# Altium PCB PCB3.PcbDoc
Units mil, origin at the board's own origin, x right, y up, seen from the top; angles counter-clockwise.
Board outline 1159.63 x 933.06 mil, 4 copper layers (Component Side, Ground Plane, Power Plane, Solder Side), stack 33.234 mil thick; 34 components, 28 nets, 138 pads, 126 vias.
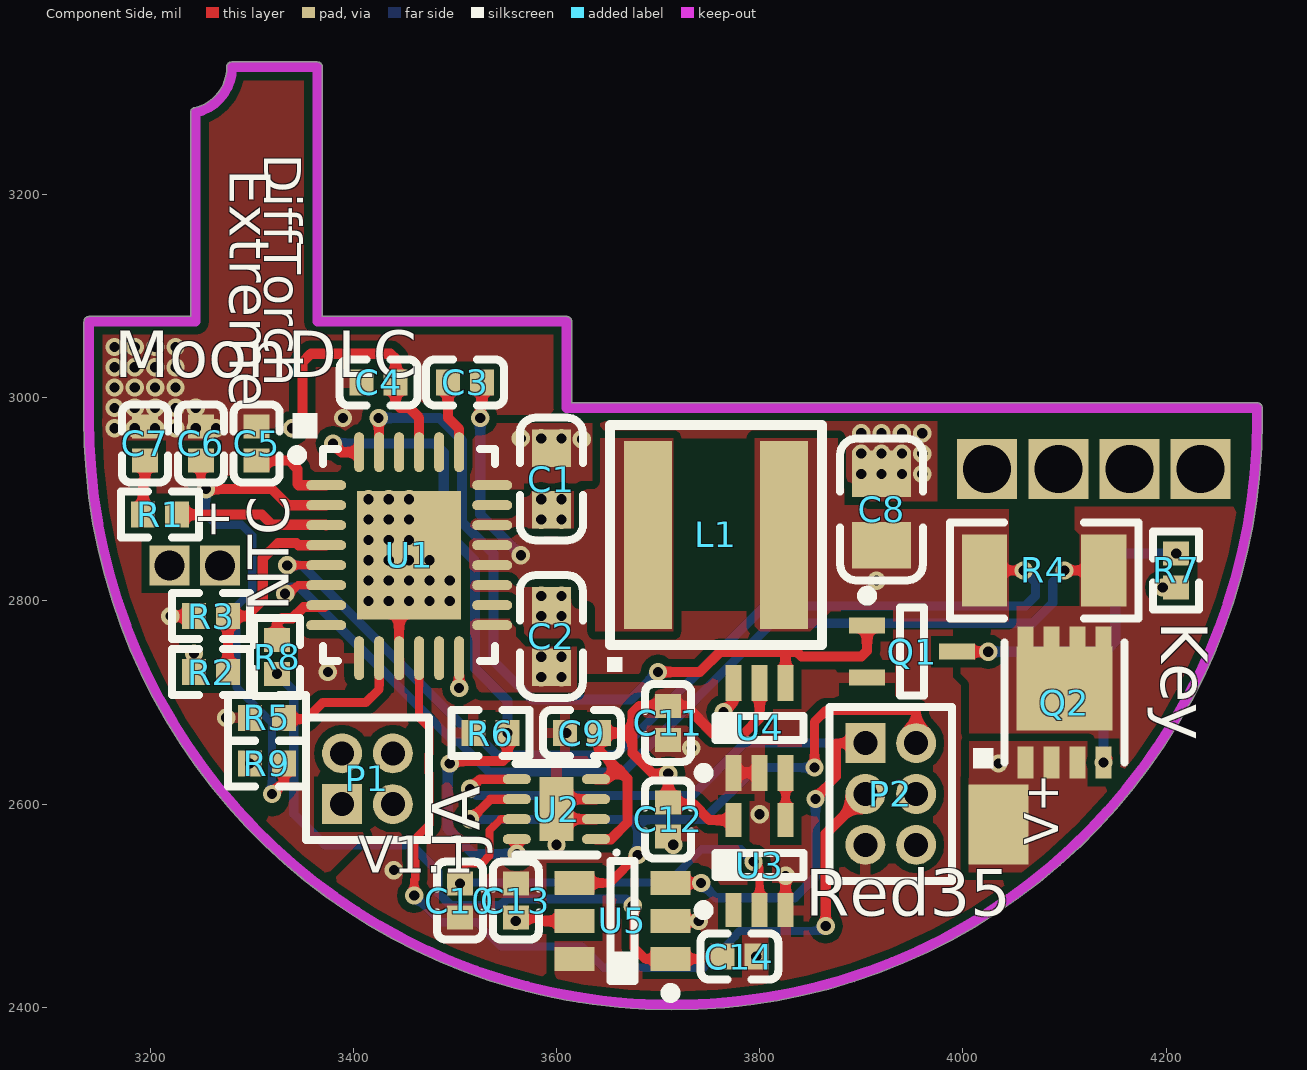
[diagram p0: Component Side view]
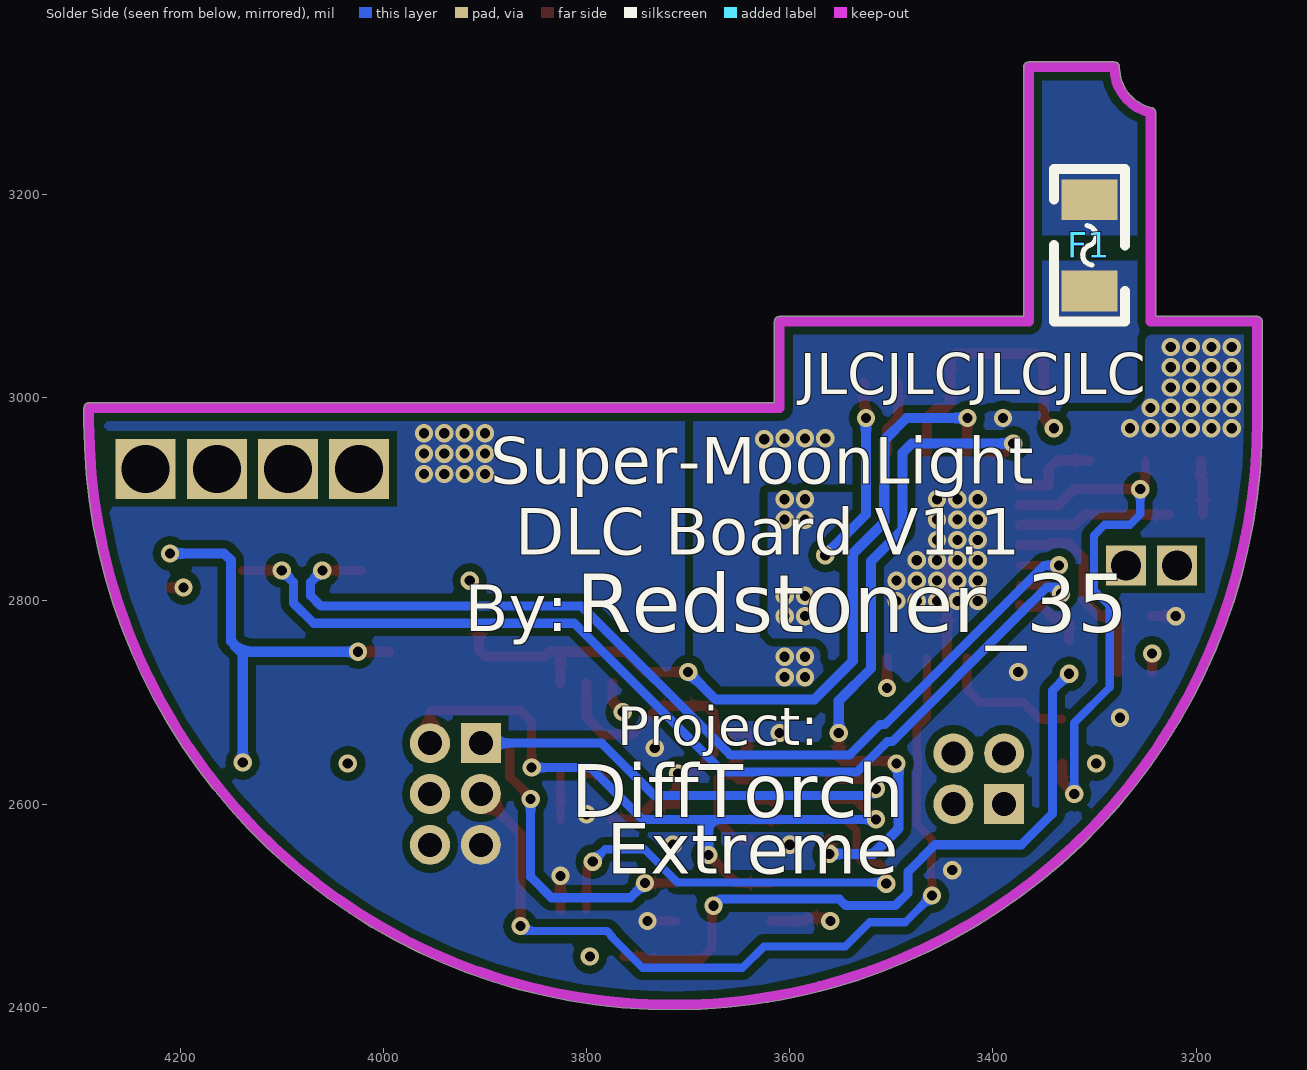
[diagram p1: Solder Side view, seen from below]
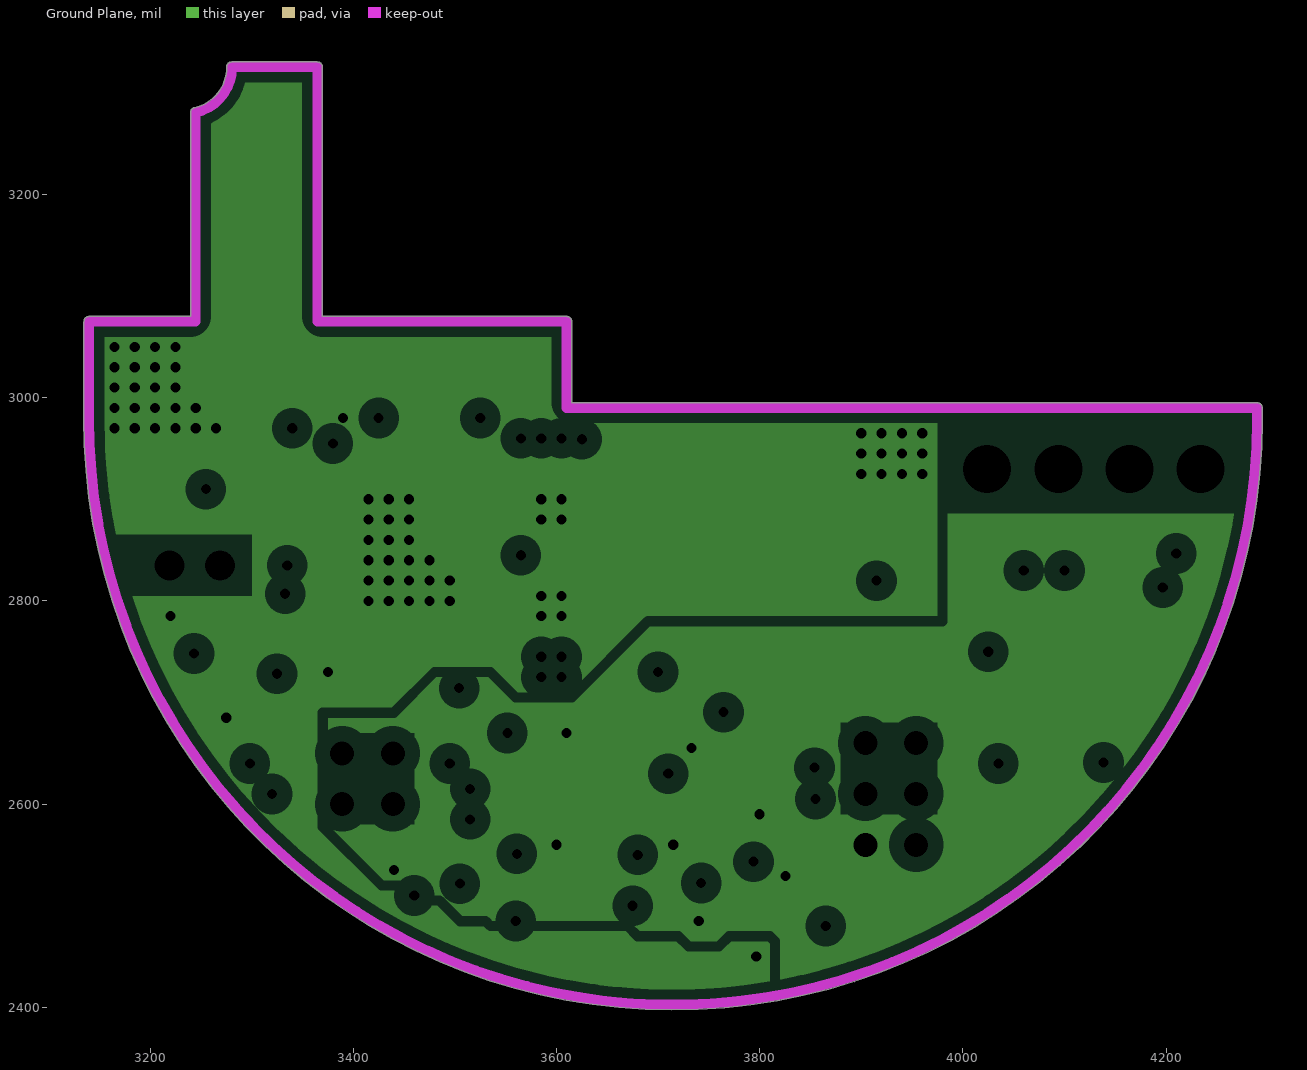
[diagram p2: Ground Plane, clearances drawn from the general rule]
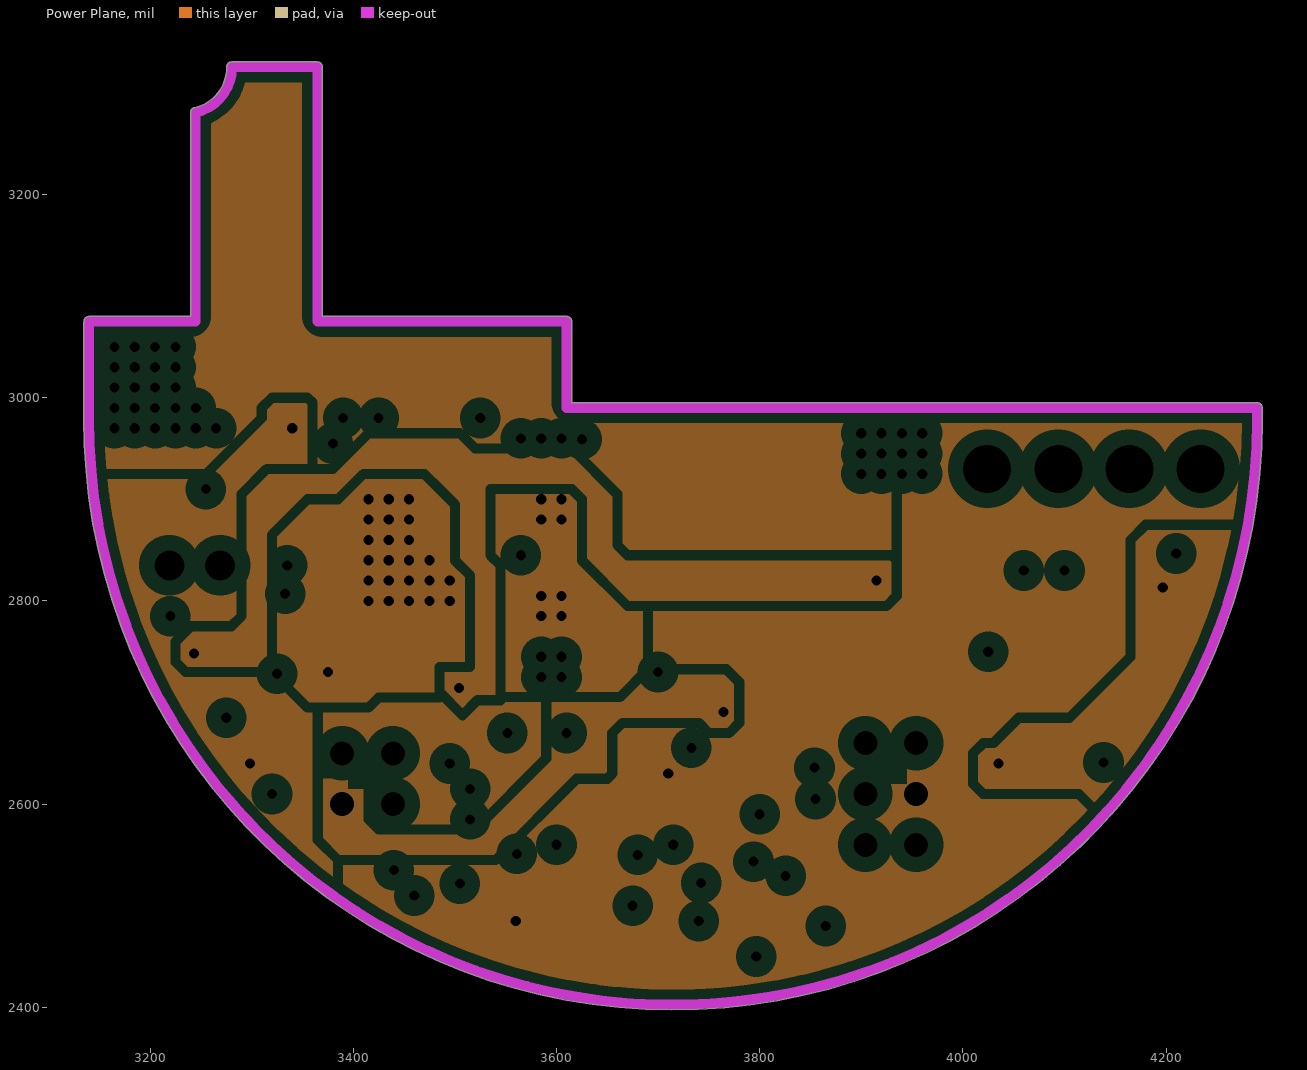
[diagram p3: Power Plane, clearances drawn from the general rule]
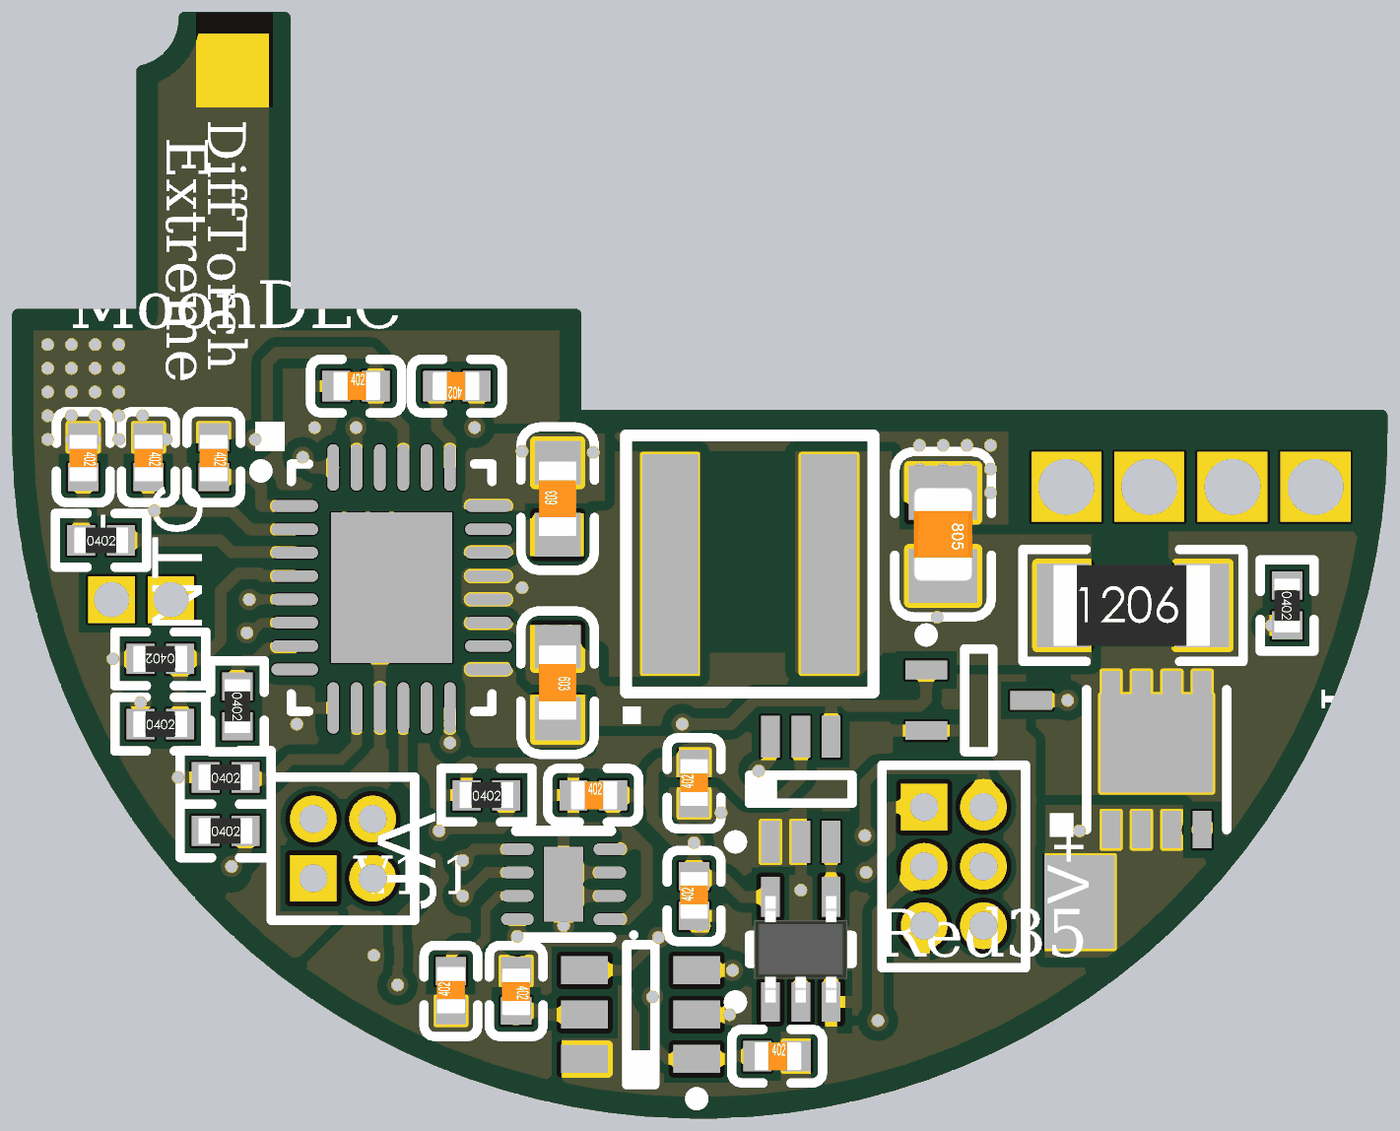
[diagram p4: 3D render of the assembled board from above, using the file's embedded part models]

## Layer stack, top to bottom
Top Solder: solder mask 0.4, Solder Resist, Dk 3.5
Component Side: signal copper 1.4
Dielectric 1: core 12.6, FR-4, Dk 4.8
Ground Plane: plane copper 1.417
Dielectric 3: prepreg 5, Dk 4.2
Power Plane: plane copper 1.417
Dielectric 4: core 10, Dk 4.2
Solder Side: signal copper 1.4
Bottom Solder: solder mask 0.4, Solder Resist, Dk 3.5

## Board outline
3134.99,2979.99 3134.99,3075 cw(c3140,3075) 3140,3080.01 3239.84,3080.01 3239.84,3280.65 cw(c3244.86,3280.65) 3243.77,3285.54 ccw(c3235,3325) 3275.42,3325 ccw(c3235,3325) 3275.42,3325.36 ccw(c3235,3325) 3275.42,3325.39 3275.42,3325.36 cw(c3280.43,3325.43) 3280.43,3330.45 3364.68,3330.45 cw(c3364.68,3325.43) 3369.7,3325.43 3369.7,3080.01 3610,3080.01 cw(c3610,3075) 3615.01,3075 3615.01,2995.01 4289.6,2995.01 cw(c4289.6,2990) 4294.61,2990 4294.61,2977.2 cw(c3714.8,2977.2)

## Design rules (kind name [scope] priority, off if disabled: settings)
Clearance [All] p1: gap=8
DiffPairsRouting [All] p1: maxlimit=9 minlimit=8 mostfreqgap=8 toplayer_minwidth=8 toplayer_maxwidth=9 toplayer_prefwidth=8 bottomlayer_minwidth=8 bottomlayer_maxwidth=9 bottomlayer_prefwidth=8 maxuncoupledlength=500
PlaneClearance [All] p1: clearance=15
PlaneConnect [All] p1: planeconnectstyle=Direct reliefexpansion=20 reliefentries=4 reliefconductorwidth=10 reliefairgap=10
PolygonConnect PolygonConnect_1 [IsVia] p1: connectstyle=Direct reliefconductorwidth=10 reliefentries=4 polygonreliefangle="90 Angle" airgapwidth=10
PolygonConnect [All] p2: connectstyle=Direct reliefconductorwidth=10 reliefentries=4 polygonreliefangle="90 Angle" airgapwidth=10
RoomDefinition main [InComponentClass('main')] p1: confinementstyle=ConfineIn formatcopy=TRUE lockcomponents=FALSE outline 7045,1060 7305,1060 7305,1460 7045,1460
RoutingVias [All] p1: holewidth=28 width=50 viastyle="Through Hole" minholewidth=28 minwidth=50 maxholewidth=28 maxwidth=50
SolderMaskExpansion [All] p1: expansion=4
Width [All] p1: maxlimit=200 minlimit=8 preferedwidth=10
27 further rules are at their usual default settings.

## Components (designator, comment, footprint, x,y, rotation, side; value= is the part's Value field where it differs from the comment)
C1 "100nF (104) 10% 50V" 0603_C 3595,2920 r90 top
C2 "100nF (104) 10% 50V" 0603_C 3595,2765 r270 top
C3 "100nF (104) 10% 16V" 0402_C 3510,3015 r180 top
C4 "10uF (106) 20% 6.3V" 0402_C 3425,3015 r0 top
C5 "1.0uF (105) 10% 25V" 0402_C 3305,2955 r270 top
C6 "1nF (102) 10% 50V" 0402_C 3250,2955 r270 top
C7 "8.2nF (822) 10% 50V" 0402_C 3195,2955 r270 top
C8 "22uF (226) 20% 25V" 0805_C 3920,2890 r270 top
C9 "100nF (104) 10% 16V" 0402_C 3625,2670 r0 top
C10 "10nF (103) 10% 50V" 0402_C 3505,2505 r90 top
C11 "100nF (104) 10% 16V" 0402_C 3710,2680 r90 top
C12 "100nF (104) 10% 16V" 0402_C 3710,2585 r90 top
C13 "100nF (104) 10% 16V" 0402_C 3560,2505 r270 top
C14 "4.7uF (475) 20% 10V" 0402_C 3780,2450 r0 top
F1 "0805 5A KOA一次性熔断" "FU 0805" 3305,3150 r270 bottom
L1 "XAL5030-222ME" FEXL0520A-***M 3690,2865 r0 top
P1 "1.27mm 2P双排针" MHDR2X2 3389.01,2600 r0 top locked
P2 "1.27mm 3P双排针" MHDR2X3 3904.01,2660 r270 top locked
Q1 "2N7002KW" SC70-3 3950,2750 r0 top
Q2 "AON7421" DFN-8_L3.0-W3.0-P0.65-BL 4100,2700 r0 top locked
R1 "200Ω (2000) ±1%" 0402_R 3210,2885 r0 top
R2 "18KΩ (1802) ±1%" 0402_R 3260,2730 r0 top
R3 "2.7KΩ (2701) ±1%" 0402_R 3260,2785 r180 top
R4 "RLM12FTCMR015" 1206_R 4080,2830 r0 top
R5 "82.5KΩ (8253) ±1%" 0402_R 3315,2685 r0 top
R6 "3.3KΩ (3301) ±1%" 0402_R 3535,2670 r0 top
R7 "4.7KΩ (4701) ±1%" 0402_R 4210,2830 r270 top
R8 "3.3KΩ (3301) ±1%" 0402_R 3325,2745 r270 top
R9 "470KΩ (4703) ±1%" 0402_R 3315,2640 r0 top
U1 "LT3935RV" LQFN-28 3455,2845 r0 top locked
U2 "AD5693RACPZ-RL7" LFCSP-8-10 3600,2595 r180 top
U3 "SN74LVC1G17DCKR" DCK0005A_N 3800,2540 r90 top
U4 "NC7SB3157P6X" SC70-6 3800,2675 r90 top
U5 "MCP3421A0T" SOT95P245X110-6N 3665,2485 r180 top

## Footprints (in the part's own frame and the unit in brackets; to place one, negate y for a bottom-side part, rotate by r counter-clockwise, add the part's x,y. Pads: shape width x height; smd on the part's side, far side on the other; paste and mask are expansions set on the pad)
0402_C [mm]
  rect 0.6x0.65 smd mask+0.051: 1(-0.425,0) 2(0.425,0)
  silkscreen extent -0.97,-0.58 0.97,0.58, body extent -0.48,-0.3 0.52,0.3, height 0.2
0402_R [mm]
  rect 0.6x0.65 smd mask+0.051: 1(-0.425,0) 2(0.425,0)
  silkscreen extent -0.97,-0.58 0.97,0.58, body extent -0.57,-0.27 0.58,0.28, height 0.41
0603_C [mm]
  rect 0.93x0.98 smd: 1(-0.77,0) 2(0.77,0)
  silkscreen extent -1.53,-0.79 1.54,0.79, body extent -0.8,-0.4 0.8,0.4, height 0.3
0805_C [mm]
  rect 1.16x1.47 smd: 1(-0.89,0) 2(0.89,0)
  silkscreen extent -1.77,-1.04 1.77,1.04, body extent -1,-0.62 1,0.63, height 0.77
1206_R [mm]
  rect 1.13x1.8 smd: 1(-1.49,0) 2(1.49,0)
  silkscreen extent -2.36,-1.2 2.35,1.2, body extent -1.7,-0.86 1.65,0.87, height 0.85
DCK0005A_N [mm] "SOT23, 5-Leads, Body 2.15x1.4mm, Pitch 0.65mm, IPC Medium Density"
  rect 0.85x0.4 smd: 1(-1.125,0.65) 2(-1.125,0) 3(-1.125,-0.65) 4(1.125,-0.65) 5(1.125,0.65)
  silkscreen extent -1.25,-1.1 0.3,1.52, body extent -1.14,-1 1.14,1, height 1.1
DFN-8_L3.0-W3.0-P0.65-BL [mm]
  rect 0.4x0.8 smd paste-100 mask+0.051: 1(-0.975,-1.5) 2(-0.325,-1.5) 3(0.325,-1.5) 4(0.975,-1.5) 5(0.975,1.5) 6(0.325,1.5) 7(-0.325,1.5) 8(-0.975,1.5)
  rect 2.4x2.1 smd paste-100 mask+0.051: 8(0,0.35)
  silkscreen extent -1.5,-1.5 1.5,1.5
FEXL0520A-***M [mm] "SZ CJIANG Automotive grade Inductor"
  rect 1.2x4.7 smd mask+0.05: 1(0,0) 2(3.4,0)
  silkscreen extent -0.95,-2.75 4.35,2.75, body extent -1.02,-2.79 4.44,2.79, height 2
"FU 0805" [mil] "贴片保险丝"
  rect 40x55 smd: 1(-45,0) 2(45,0)
  silkscreen extent -75,-35 75,35, body extent -39,-24 39,24, height 20
LFCSP-8-10 [mm] "SON, 8-Leads, Body 1.95x1.95mm, Pitch 0.50mm, Thermal Pad 1.60x0.78mm, IPC Medium Density"
  oval 0.7x0.25 smd mask+0.02: 1(-0.99,0.75) 2(-0.99,0.25) 3(-0.99,-0.25) 4(-0.99,-0.75) 5(0.99,-0.75) 6(0.99,-0.25) 7(0.99,0.25) 8(0.99,0.75)
  rect 0.85x1.6 smd mask+0.02: 9(0,0)
  silkscreen extent -1.55,-1.14 1.02,1.14, body extent -1,-1 1,1, height 0.6
LQFN-28 [mm] "QFN, 28-Leads, Body 4.00x5.00mm, Pitch 0.50mm, Thermal Pad 2.60x3.22mm, IPC Low Density"
  oval 1x0.25 smd mask+0.03: 1(-2.075,1.75) 2(-2.075,1.25) 3(-2.075,0.75) 4(-2.075,0.25) 5(-2.075,-0.25) 6(-2.075,-0.75) 7(-2.075,-1.25) 8(-2.075,-1.75) 15(2.075,-1.75) 16(2.075,-1.25) 17(2.075,-0.75) 18(2.075,-0.25) 19(2.075,0.25) 20(2.075,0.75) 21(2.075,1.25) 22(2.075,1.75)
  oval 0.25x1.1 smd mask+0.03: 9(-1.25,-2.575) 10(-0.75,-2.575) 11(-0.25,-2.575) 12(0.25,-2.575) 13(0.75,-2.575) 14(1.25,-2.575)
  oval 0.25x1 smd mask+0.03: 23(1.25,2.575) 24(0.75,2.575) 25(0.25,2.575) 26(-0.25,2.575) 27(-0.75,2.575) 28(-1.25,2.575)
  rect 2.6x3.22 smd mask+0.03: 29(0,0)
  silkscreen extent -2.92,-2.65 2.15,2.65, body extent -2,-2.5 2,2.5, height 1.05
MHDR2X2 [mm] "Connector; Header; 2x2 Position"
  rect 1x1 hole 0.6: 1(0,0)
  round 1 hole 0.6: 2(0,1.27) 3(1.27,0) 4(1.27,1.27)
  silkscreen extent -0.9,-0.9 2.17,2.17
MHDR2X3 [mm] "Connector; Header; 3x2 Position"
  rect 1x1 hole 0.6: 1(0,0)
  round 1 hole 0.6: 2(0,1.27) 3(1.27,0) 4(1.27,1.27) 5(2.54,0) 6(2.54,1.27)
  silkscreen extent -0.9,-0.9 3.44,2.17
SC70-3 [mm] "3 Lead SC70(SOT-323) package for small Transistor"
  rect 0.9x0.4 smd mask+0.05: 1(-1.125,0.65) 2(-1.125,-0.65) 3(1.125,0)
  silkscreen extent -1.25,-1.1 0.3,1.52, body extent -0.67,-1.1 0.67,1.1, height 1.1
SC70-6 [mm] "SOT23, 6-Leads, Body 2.00x2.10mm, Pitch 0.65mm, IPC Medium Density"
  rect 0.9x0.4 smd mask+0.05: 1(-1.125,0.65) 2(-1.125,0) 3(-1.125,-0.65) 4(1.125,-0.65) 5(1.125,0) 6(1.125,0.65)
  silkscreen extent -1.25,-1.1 0.3,1.52, body extent -0.67,-1.1 0.67,1.1, height 1.1
SOT95P245X110-6N [mm] "SOT23, 6-Leads, Body 2.90x2.45mm, Pitch 0.95mm, IPC Medium Density"
  rect 1x0.6 smd: 1(-1.2,0.95) 2(-1.2,0) 3(-1.2,-0.95) 4(1.2,-0.95) 5(1.2,0) 6(1.2,0.95)
  silkscreen extent -1.33,-1.5 0.3,1.92, body extent -0.7,-1.5 0.7,1.5, height 1.1

## Part data
C1 C2: library part "0603 100nF (104) 10% 50V", "贴片电容"
C3 C9 C11 C12 C13: library part "0402 100nF (104) 10% 16V", "贴片电容"
C4: library part "0402 10uF (106) 20% 6.3V", "贴片电容"
C5: library part "0402 1.0uF (105) 10% 25V", "贴片电容"
C6: library part "0402 1nF (102) 10% 50V", "贴片电容"
C7: library part "0402 2.2nF (222) 10% 50V", "贴片电容"
C8: library part "0805 22uF (226) 20% 25V", "贴片电容"
C10: library part "0402 10nF (103) 10% 50V", "贴片电容"
C14: library part "0402 4.7uF (475) 20% 10V", "贴片电容"
F1: library part "Fuse 1", "Fuse"
L1: library part "Inductor Iron", "Magnetic-Core Inductor"
P1: library part MHDR2X2, "Header, 2-Pin, Dual row"
P2: library part MHDR2X3, "Header, 3-Pin, Dual row"
Q1: library part "2N7002 7002", "MOS(场效应管)"
Q2: library part "SON/DFN5x6 MOS", "PDFN3x3 -20V -50A 5.8mΩ P-Ch MOSFET"
R1 R2 R3: library part "0402 10KΩ (1002) 1%", "贴片电阻"
R4: library part "1206 0Ω (0R0) 1%", "贴片合金检流电阻 15mΩ (R015) ±1% 1206 1W"
R5: library part "0402 1KΩ (1001) 1%", "贴片电阻"
R6 R8: library part "0402 3.3KΩ (3301) 1%", "贴片电阻"
R7: library part "0402 4.7KΩ (4701) 1%", "贴片电阻"
R9: library part "0402 470KΩ (4703) 1%", "贴片电阻"
U1: "36V 4A Synchronous Buck LED Driver"
U2: "16bit I2C Nano DAC with 2.5V internal Ref in 2x2mm SON"
U3: "Single Schmitt-Trigger Buffer, DCK0005A, LARGE T&R"
U4: "Low-Voltage Analog Switch SPDT,1.8-5V Power"
U5: library part MCP3421, "I2C差分输入ADC，18位 240SPS"

## Free pads (board coordinates)
  rect 39.37x39.37 hole 29.53 mask+1.97: 0(3268.94,2835) 1(3218.94,2835)
  rect 59.06x78.74 smd mask+1.97: 0(4035,2580)
  round 0 all layers, no hole paste+0 mask+0: 1(3373.31,2815.47) 1(3373.31,2835.16) 1(4021.34,2830) 1(4138.66,2830)
  rect 59.06x59.06 hole 47.24 mask+1.97: 2(4023.94,2930) 4(4093.94,2930) 5(4233.94,2930) 6(4163.94,2930)

## Via types
v1: diameter 18, hole 10, Component Side to Solder Side, tented both sides, 126 vias

## Nets (pads, with @x,y where several pads share a name; then routed paths per layer and width w, separated by ;. In a path a pad name is that pad's centre, name@x,y a point inside that pad or via, vN(x,y) a via of type N, cw(c..) or ccw(c..) an arc to the next point about the centre after c; other vN are vias at no path point)
3V3: C9.2 C11.2 C12.2 C13.2 P2.4 U2.1 U2.4 U3.5 U4.5 U5.5 | length 623.3
  Component Side w10: v1(3560,2485) C13.2 3581.73,2488.27 3585,2485 U5.5 ; U2.1 3653.49,2565.47 3670,2581.98 3670,2625 3660,2635 ; U2.4 3649.53,2624.53 3660,2635 ; U3.5 3750.71,2584.29 3735.01,2599.99 3710,2599.99 C12.2 v1(3710,2630) 3695,2630 3675,2650 3675,2670 ; U4.5 3800,2685 3783.59,2668.59 3755.3,2668.59 3727.16,2696.73 C11.2 3681.73,2696.73 3675,2690 3675,2670 ; 3660,2635 3641.73,2653.27 C9.2 3675,2670
12V: C1.2 C2.2 F1.2 U1.15 U1.22
  other v1: 3585,2725 3605,2725 3585,2745 3605,2745 3625,2959.09 3565,2960 3585,2960 3605,2960
BST: C3.2 U1.23 | length 73.2
  Component Side w10: C3.2 3493.27,2980.16 3504.21,2969.21 U1.23
BUCKEN: U3.4 U4.3 | length 46.4
  Component Side w8: U3.4 U4.3
DACREF: C10.2 U2.7 U3.2 | length 462.9
  Component Side w8: v1(3505,2521.73) 3505,2535 3511.73,2541.73 3526.73,2541.73 3534.24,2549.24 3534.24,2574.24 3545.16,2585.16 U2.7 ; v1(3793.9,2543.4) 3800,2537.3 U3.2
  Solder Side w8: v1(3505,2521.73) 3506.27,2523 3710.3,2523 3742.94,2555.64 3781.67,2555.64 v1(3793.9,2543.4)
DIM: R6.2 U1.28 U2.8 | length 684.6
  Component Side w10: v1(3380,2955) 3388.62,2946.38 U1.28 ; v1(3495,2640) 3497.45,2642.45 3547.45,2642.45 3551.73,2646.73 v1(3551.73,2670) ; v1(3561.02,2551.02) U2.8
  Solder Side w10: v1(3380,2955) 3480,2955 3489,2946 3489,2870.09 3520,2839.09 3520,2733.43 3551.73,2701.7 v1(3551.73,2670) ; v1(3495,2640) 3493,2638 3493,2575.89 3517.86,2551.02 v1(3561.02,2551.02)
EN: Q1.1 U1.27 U4.4 | length 817.6
  Component Side w10: v1(3425,2980) 3425,2970 3425.47,2969.53 U1.27 ; v1(3700,2730) 3741.14,2730 3761.15,2750.01 3825,2750.01 ; U4.4 3825.59,2749.42 3825,2750.01 ; Q1.1 3905.71,2750.99 3900,2745.28 3841.19,2745.28 3836.46,2750.01 3825,2750.01
  Solder Side w10: v1(3425,2980) 3485,2980 3507,2958 3507,2877.54 3538,2846.54 3538,2740.89 3575.89,2703 3673,2703 v1(3700,2730)
GND: C1.1 C2.1 C4.1 C5.1 C6.1 C7.1 C8.1 C14.2 R3.2 R5.1 U1.9 U1.11 U1.17 U1.20 U1.29 U5.6 | length 119.8
  Component Side w9: v1(3375,2730) v1@3380,2730
  Component Side w10: v1(3220,2785) R3.2 ; U1.11 U1.29@3445.16,2835.16
  other v1: 3796.73,2450 3275,2685 3585,2785 3605,2785 3415,2800 3435,2800 3455,2800 3475,2800 3495,2800 3585,2805 3605,2805 3415,2820 3435,2820 3455,2820 3475,2820 3495,2820 3415,2840 3435,2840 3455,2840 3475,2840 3415,2860 3435,2860 3455,2860 3415,2880 3435,2880 3455,2880 3585,2880 3605,2880 3415,2900 3435,2900 3455,2900 3585,2900 3605,2900 3900,2925 3920,2925 3940,2925 3960,2925 3900,2945 3920,2945 3940,2945 3960,2945 3900,2965 3920,2965 3940,2965 3960,2965 3165,2970 3185,2970 3205,2970 3225,2970 3245,2970 3265,2970 3390,2980 3165,2990 3185,2990 3205,2990 3225,2990 3245,2990 3165,3010 3185,3010 3205,3010 3225,3010 3165,3030 3185,3030 3205,3030 3225,3030 3165,3050 3185,3050 3205,3050 3225,3050
IMON: R8.1 U1.7 | length 71.9
  Component Side w10: R8.1 3325,2778 3330,2783 3340.1,2783 3351.12,2794.02 3371.54,2794.02 U1.7
IOUT: C14.1 R8.2 U5.1 | length 667.3
  Component Side w9: v1(3675,2500) 3676.5,2498.5 3676.5,2458.5 3687.4,2447.6 U5.1 3742.6,2447.6 3745,2450 C14.1
  Solder Side w9: v1(3325,2728.27) 3341.5,2711.77 3341.5,2590.46 3371.96,2560 3456.98,2560 3483.5,2533.48 3483.5,2512.83 3496.09,2500.23 3544.83,2500.23 3551.09,2506.5 3668.5,2506.5 v1(3675,2500)
ISO: pad.1@3373.31,2815.47 pad.1@4138.66,2830 Q2.5 Q2.6 Q2.7 Q2.8 R4.2 U1.6 | length 1025.2
  Component Side w8: v1(3332.99,2807.01) 3337.01,2807.01 3345.47,2815.47 U1.6
  Component Side w9: v1(3332.99,2807.01) v1@3333.5,2807.52 ; v1(4100,2830) R4.2
  Solder Side w9: v1(3332.99,2807.01) 3335,2809.02 3335,2813.5 3347.05,2813.5 3350.55,2810 3372.98,2787.57 3499.05,2661.5 3503.91,2661.5 3533.91,2631.5 3665.54,2631.5 3812.04,2778 4068.54,2778 4088.5,2797.96 4088.5,2818.5 v1(4100,2830)
IVCC: C4.2 R9.1 U1.25 | length 273
  Component Side w10: v1(3340,2970) 3350,2980 3350,3035 3358.27,3043.27 3436.73,3043.27 3441.73,3038.27 C4.2 3441.73,2994.38 3446.11,2990 3455,2990 3464.84,2980.16 U1.25
  other v1: 3298.27,2640
LEDO: pad.0@4035,2580 Q2.1 Q2.2 Q2.3 R7.2 | length 13.3
  Component Side w10: v1(4196.73,2813.27) R7.2
  other v1: 4035,2640
MBEN: P1.1 U4.6 | length 32.8
  Component Side w10: v1(3764.41,2690.59) 3774.41,2700.59 U4.6
NetC7_2: C7.2 R1.1 | length 54
  Component Side w10: R1.1 3193.27,2918.27 3195,2920 C7.2
NetQ1_3: Q1.3 Q2.4 R7.1 | length 423.6
  Component Side w10: Q1.3 v1(4025,2750) ; v1(4138.39,2640.94) 4142.36,2644.91 v1(4138.39,2640.94)
  Solder Side w10: v1(4025,2750) 4140,2750 ; v1(4138.39,2640.94) 4138.39,2748.39 4140,2750 ; v1(4210,2846.73) 4156.73,2846.73 4150,2840 4150,2760 4140,2750
PWMDIM: P2.3 U1.12 | length 845.2
  Component Side w8: v1(3460,2510) 3460,2525.3 3461,2526.3 3461,2543.7 3460,2544.7 3460,2565 3475,2580 3475,2630.3 3474,2631.3 3474,2648.7 3475,2649.7 3475,2675 3464.84,2685.16 U1.12
  Component Side w10: v1(3865,2480) 3865,2570.99 P2.3
  Solder Side w8: v1(3460,2510) 3486.27,2483.73 3521.57,2483.73 3545.3,2460 3625.3,2460 3646.3,2439 3745,2439 3776,2470 3775,2470 3780,2475 3860,2475 v1(3865,2480)
RT: R5.2 U1.10 | length 135.6
  Component Side w9: R5.2@3332.55,2683.75 3353.75,2683.75 3370,2700 3412.36,2700 3425.47,2713.11 U1.10
SCL: P2.1 U2.5 U5.3 | length 788.8
  Component Side w9: v1(3515,2615) 3524.53,2624.53 U2.5 ; U5.3 v1(3742.4,2522.4) ; v1(3855,2605) 3855,2606.51 3875.54,2627.05 3875.54,2660 P2.1
  Solder Side w9: v1(3515,2615) 3521.5,2608.5 3733.5,2608.5 3785,2660 P2.1 ; v1(3742.4,2522.4) 3756.89,2507.91 3834.5,2507.91 3855,2528.41 v1(3855,2605)
SDA: P2.2 U2.6 U5.4 | length 704.2
  Component Side w9: v1(3515,2585) 3515.41,2585 3535.25,2604.84 U2.6 ; U5.4 3652.4,2522.4 v1(3680,2550) ; v1(3854.04,2635.96) 3854.04,2680.96 3865.27,2692.19 3952.81,2692.19 3954.01,2690.99 P2.2
  Solder Side w9: v1(3515,2585) 3680,2585 ; v1(3680,2550) 3680,2585 ; v1(3854.04,2635.96) 3795.96,2635.96 3745,2585 3680,2585
SGND: C9.1 C10.1 C11.1 C12.1 C13.1 P2.5 Q1.2 R6.1 U2.2 U2.3 U2.9 U3.3 U4.1 U4.2 U5.2 | length 145.3
  Component Side w9: U5.2 v1(3740,2485)
  Component Side w10: U2.9@3609.84,2585.16 U2.2 ; U2.9@3609.84,2604.84 U2.3 ; U4.1 U4.2 ; U3.3 v1(3825.59,2529.41)
  other v1: 3440,2535 3600,2560 3715,2560 3800,2590 3732.8,2655.34 3610,2670
SS: C6.2 R9.2 U1.2 | length 549.6
  Component Side w8: C6.2 3250,2915 v1(3255,2910)
  Component Side w10: v1(3255,2910) 3320,2910 3335.79,2894.21 U1.2 ; v1(3320,2610) 3331.73,2621.73 R9.2
  Solder Side w8: v1(3255,2910) 3255,2885 3265,2875 3290,2875 3300.62,2864.38 3300.62,2810.34 3285,2794.72 3285,2715 3320.27,2679.73 3320,2679.46 v1(3320,2610) 3320,2605.54 v1@3320.27,2605.27
SW: C3.1 L1.1 U1.18 U1.19 | length 187.3
  Component Side w10: v1(3525,2980) 3525,2990 3526.73,2991.73 C3.1
  Solder Side w10: v1(3525,2980) 3525,2885 v1(3565,2845)
VCCIN: F1.1
VCOMP: R1.2 U1.3 | length 150.9
  Component Side w10: R1.2 3310,2885 3320,2875 3372.83,2875 U1.3
VFB: R2.2 R3.1 U1.4 | length 206.4
  Component Side w10: R2.2 R3.1 3295,2785 3310.89,2800.89 3310.89,2842 3325.89,2857 3344.11,2857 3346.27,2854.84 U1.4
VLED: C8.2 L1.2 R2.1 R4.1 U1.5 U1.14 | length 1033
  Component Side w8: v1(3335,2835) 3335.16,2835.16 U1.5
  Component Side w9: R4.1 v1(4060,2830)
  Component Side w10: R2.1 v1(3243.27,2748.27) ; v1(3504.21,2714.21) U1.14
  Solder Side w9: v1(3335,2835) 3349.59,2835 3506.09,2678.5 3510.95,2678.5 3540.95,2648.5 3658.5,2648.5 3805,2795 4061.5,2795 4071.5,2805 4071.5,2818.5 v1(4060,2830)
  other v1: 3915,2820
VREF: C5.2 U1.1 | length 87.2
  Component Side w10: C5.2 3336.73,2938.27 3345,2930 3345,2915 3346.1,2913.9 U1.1
pads on no net: P1.2 P1.3 P1.4 P2.6 U1.8 U1.13 U1.16 U1.21 U1.24 U1.26 U3.1

## Polygon pours and split planes (outlines as drawn)
ISO on Component Side "Component Side-No Net 1" (solid, remove dead copper, pour order 115): 4070,2670 4125,2670 4125,2567 4125.11,2566.89 4127,2565 4230,2565 4230,2695 4235,2700 4200,2735 4070,2735
GND on Component Side "Component Side-No Net 1" (solid, remove dead copper, pour order 62): 3280.43,3325.43 3304.57,3325.43 3305,3325 3355,3325 3295,3035 3260,3000 3150,3000 3150,3070 3155,3075 3244.86,3075 3244.86,3280.65 3245,3330 3250,3330
GND on Component Side "Component Side-No Net 1" (solid, remove dead copper, pour order 57): 3280.43,3075 3280.43,2925.43 3275,2920 3155,2920 3155,3070 3150,3075 3155,3075
GND on Component Side "Component Side-No Net 1" (solid, remove dead copper, pour order 53): 3320,2770 3325,2765 3435,2765 3435,2675 3430,2670 3420,2660 3420,2560 3270,2560 3235,2595 3220,2595 3220,2760.75 3221.61,2762.36 3231.7,2772.44 3231.7,2775
GND on Component Side "Component Side-No Net 1" (solid, remove dead copper, pour order 73): 3258.62,3321.5 3258.62,3075 3170,3075 3165,3080 3165,3005 3340,3005 3360,2985 3372.56,2997.56 3372.56,3321.5 3365,3321.5
GND on Component Side "Component Side-No Net 1" (solid, remove dead copper, pour order 68): 3165,3325 3185,3305 3455,3305 3455,3068.87 3421.92,3035.8 3366.13,2980 3195,2980 3045,2980 3040,2985 3080,3025 3080,3320
GND on Component Side "Component Side-No Net 1" (solid, remove dead copper, pour order 51): 3514.18,2831.39 3515,2830.57 3515,2785 3560,2785 3565,2780 3575,2770 3630,2770 3630,2835 3517.79,2835 3514.18,2831.39
12V on Component Side "Component Side-No Net 1" (solid, remove dead copper, pour order 54): 3515,2905 3520,2910 3625,2910 3625,2965 3620,2970 3615,2975 3570,2975 3515,2975
12V on Component Side "Component Side-No Net 1" (solid, remove dead copper, pour order 59): 3515,2785 3515.94,2785.94 3560,2785 3560,2780 3560,2765 3570,2755 3620,2755 3620,2710 3570,2710 3520,2710 3515,2715
GND on Component Side "Component Side-No Net 1" (solid, remove dead copper, pour order 63): 3231.16,3293.84 3231.16,2998.84 3240,2990 3270.91,2959.09 3625,2959.09 3625,3067.68 3613.84,3078.84 3607.68,3085 3355,3085 3355,3286.55 3346.92,3294.63
GND on Component Side "Component Side-No Net 1" (solid, remove dead copper, pour order 65): 3270.91,2959.09 3270,2960 3130,2960 3130,3072.68 3136.16,3078.84 3147.32,3090 3280,3090
12V on Component Side "Component Side-No Net 1" (solid, remove dead copper, pour order 66): 3541.34,2975 3635,2975 3635,2910 3517.07,2910 3515,2912.07 3525,2922.07 3525,2980
GND on Component Side "Component Side-No Net 1" (solid, remove dead copper, pour order 67): 3515,2885 3545.99,2915.99 3567.71,2915.99 3619.01,2915.99 3625,2910 3630,2905 3630,2860 3515.57,2860 3514.18,2858.61
GND on Component Side "Component Side-No Net 1" (solid, remove dead copper, pour order 69): 3970,2970 3970,2890 3905,2890 3885,2910 3885,2995 3970,2995
VLED on Component Side "Component Side-No Net 1" (solid, remove dead copper, pour order 70): 3970,2890 3970,2875 4045,2875 4045,2810 4045,2780 3930,2780 3895,2780 3890,2780 3890,2875 3905,2890
SGND on Component Side "Component Side-No Net 1" (solid, remove dead copper, pour order 72): 3690,2685 3738.89,2685 3755.3,2668.59 3778.59,2668.59 3801.41,2668.59 3805,2665 3805,2610 3765,2610 3765,2605 3680,2605 3675,2610 3675,2690
SGND on Component Side "Component Side-No Net 1" (solid, remove dead copper, pour order 74): 3475,2715 3476.13,2713.87 3620,2713.87 3620,2720 3690,2720 3885,2740 3890,2730 3895,2725 3905,2725 3985,2725 3990,2725 3995,2720 3998.11,2716.89 3998.11,2471.32 3998.11,2423.11 3970,2395 3960,2385 3370,2385 3370,2515 3405,2550 3475,2620 3475,2710
GND on Component Side "Component Side-No Net 1" (solid, remove dead copper, pour order 76): 3575,2920 3583.66,2911.34 3583.66,2430.99 3104.01,2430.99 3040,2495 2955,2580 2955,3070 3575,3070 3585,3060
SGND on Component Side "Component Side-No Net 1" (solid, remove dead copper, pour order 82): 3990,2725 3990,2780 3985,2785 3973.16,2796.84 3810.8,2796.84 3786.84,2796.84 3750,2760 3743.97,2753.97 3743.97,2698.66 3846.34,2698.66 3865,2680 3866.42,2681.42 3972,2681.42 3995.26,2681.42 3998.11,2684.27
VLED on Component Side "Component Side-No Net 1" (solid, remove dead copper, pour order 83): 3960,2890 4045,2890 4045,2780 3980,2780 3945,2780 3940,2785
ISO on Component Side "Component Side-No Net 1" (solid, remove dead copper, pour order 84): 4110,2885 4110,2870 4115,2865 4115,2795 4110,2790 4108.54,2791.46 4045,2791.46 4045,2675 4040,2670 4185,2670 4245,2670 4250,2675 4330,2755 4330,2895 4110,2895
ISO on Component Side "Component Side-No Net 1" (solid, remove dead copper, pour order 85): 4046.53,2670 4002.07,2670 3998.11,2673.96 3990,2682.07 3990,2780 4033.54,2780 4045,2791.46 4048.54,2795 4130,2795 4155,2795 4165,2785 4183.25,2766.75 4183.25,2671.93
LEDO on Component Side "Component Side-No Net 1" (solid, remove dead copper, pour order 86): 3998.11,2670 3997.47,2669.36 3997.47,2533.03 4238.03,2533.03 4240,2535 4300,2595 4300,2680
SGND on Component Side "Component Side-No Net 1" (solid, remove dead copper, pour order 87): 3855,2715 3860.01,2720.01 4005.64,2720.01 4064.35,2720.01 4122.52,2661.84 4120,2659.33 4120,2470 3905,2470 3825,2390 3800,2415 3780,2415
GND on Component Side "Component Side-No Net 1" (solid, remove dead copper, pour order 91): 3780,2475 3825,2475 3827.91,2472.09 3827.91,2408.53 3768.53,2408.53 3740,2380 3610,2380 3565,2380 3550,2395 3550,2530 3695,2530 3705,2520 3705.44,2520.44 3774.63,2520.44
SGND on Component Side "Component Side-No Net 1" (solid, remove dead copper, pour order 92): 3420,2540 3523.16,2540 3532.2,2530.96 3535,2528.16 3535,2455 3535,2450 3530,2445 3435,2445 3420,2445 3415,2450
SW on Component Side "Component Side-No Net 1" (solid, remove dead copper, pour order 93): 3510,2825 3549.97,2825 3561.19,2813.79 3604.97,2770 3630,2770 3715,2770 3715,2960 3625.91,2960 3625,2959.09 3615.91,2950 3515,2950 3510,2950
VLED on Component Side "Component Side-No Net 1" (solid, remove dead copper, pour order 94): 3890,2791.46 3888.54,2790 3870,2790 3850,2770 3820,2770 3800,2770 3795,2775 3795,2960 3845,2960 3860,2960 3880,2960 3885,2955 3885,2910 3896.54,2910 3908.38,2898.16 3910.22,2900 3955,2900 3955,2865 3970,2850 3970,2795
GND on Component Side "Component Side-No Net 1" (solid, remove dead copper, pour order 96): 3640,2995 3643.16,2991.84 3643.16,2960 3817.27,2960 3883.06,2894.2 3892.27,2885 3975,2885 3975,2995
GND on Component Side "Component Side-No Net 1" (solid, remove dead copper, pour order 97): 3562.5,2813.64 3565,2811.14 3565,2715 3670.64,2715 3676.66,2708.98 3841.19,2706.54 3841.19,2745.28 3900,2745.28 3905.71,2750.99 3915.23,2760.52 3915.23,2767.91 3915.23,2784.77 3910,2790 3905,2790 3665,2790 3645,2810
3V3 on Component Side "Component Side-No Net 1" (solid, remove dead copper, pour order 98): 3683.99,2736.63 3683.99,2682.14 3689.2,2676.92 3716.13,2650 3770,2650 3770,2750 3756.63,2736.63 3683.99,2736.63 3683.99,2738.5 3687.74,2742.26
GND on Component Side "Component Side-No Net 1" (solid, remove dead copper, pour order 99): 3258.62,3326.51 3258.62,3067.83 3263.69,3062.75 3260.94,3060 3140,3060 3140,2970 3135,2965 3140,2970 3360,2970 3360,3125 3370,3135 3368.52,3136.48 3368.52,3325.33
GND on Component Side "Component Side-No Net 1" (solid, pour order 52): 3350,3085 3356.16,3078.84 3613.84,3078.84 3613.84,2968.84 3605,2960 3602.74,2957.74 3352.26,2957.74
SGND on Component Side "Component Side-No Net 1" (solid, remove dead copper, pour order 58): 3455,2655 3472.3,2637.7 3566.89,2637.7 3566.89,2565.39 3590.07,2542.21 3590,2542.14 3590,2415 3450,2415 3435,2400 3425,2410 3370,2410 3370,2645 3390,2665
GND on Solder Side "Component Side-No Net 1" (solid, remove dead copper, pour order 111): 3865,2955 3898.37,2921.63 3898.37,2816.48 3998.52,2816.48 4085,2730 4095,2720 4095,2605 4300,2605 4305,2610 4330,2635 4330,2925 4330,2960
3V3 on Solder Side "Component Side-No Net 1" (solid, remove dead copper, pour order 109): 3704.04,2670 3733.77,2640.28 3733.77,2626.79 3733.77,2622.27 3720,2608.5 3525,2608.5 3525,2635 3520,2640 3550,2670 3704.04,2670
VCCIN on Solder Side "Component Side-No Net 1" (solid, remove dead copper, pour order 107): 3240,3160 3370,3160 3369.11,3160.89 3369.11,3327.35 3369.11,3339.11 3370,3340 3365,3345 3240,3345
12V on Solder Side "Component Side-No Net 1" (solid, remove dead copper, pour order 105): 3240,3135 3370,3135 3369.7,3134.7 3369.7,3080.02 3612.66,3080.02 3613.84,3078.84 3615.02,3077.66 3615.02,2995.02 3704.98,2995.02 3705,2995 3710,2990 3710,2670 3550,2670 3540,2680 3505,2715 3505,2920 3277.65,2920 3243.37,2954.28
GND on Solder Side "Component Side-No Net 1" (solid, remove dead copper, pour order 103): 3210,3065 3250,3065 3250,2998.18 3261.34,2986.84 3263.18,2985 3290,2985 3290,2945 3295,2940 3293.27,2938.27 3154.59,2938.27 3154.59,3060.41 3153.25,3061.75 3156.51,3065 3160,3065
12V on Solder Side "Component Side-No Net 1" (solid, remove dead copper, pour order 60): 3555,2915 3535,2915 3530,2920 3525,2925 3525,3005 3500,3005 3495,3010 3495,3040 3575,3040 3585,3030 3585,2917.33
SGND on Solder Side "Component Side-No Net 1" (solid, remove dead copper, pour order 77): 3495,2665.55 3504.45,2665.55 3530,2640 3655,2640 3660,2640 3745,2725 3990,2725 4000,2715 4000,2450 4000,2390 3990,2380 3960,2350 3355,2350 3355,2500 3390,2535 3420,2565 3420,2665
GND on Solder Side "Component Side-No Net 1" (solid, remove dead copper, pour order 78): 3136.16,3078.84 3215,3000 3980,3000 3980,2705 3625.3,2472.24 3190,2435 3145,2435 3140,2430 3115,2430
SGND on Solder Side "Component Side-No Net 1" (solid, remove dead copper, pour order 79): 3535.87,2717.57 3535.87,2654.13 3555,2635 3560,2640 3685,2640 3685,2680 3705,2700 3700,2705 3700,2720
GND on Solder Side "Component Side-No Net 1" (solid, remove dead copper, pour order 80): 3975,2985 3980,2990 4310,2990 4310,2710 4295,2725 3855,2725 3795,2725 3725,2795 3695,2825 3695,2990 3715,2990 3720,2995
GND on Solder Side "Component Side-No Net 1" (solid, remove dead copper, pour order 81): 3134.57,3075 3149.57,3090 3530,3090 3530,2775 3500,2745 3110,2745
SGND on Solder Side "Component Side-No Net 1" (solid, remove dead copper, pour order 88): 3725,2795 3725,2395 3735,2385 3755,2405 4375,2405 4375,2805 4385,2815
GND on Solder Side "Component Side-No Net 1" (solid, remove dead copper, pour order 89): 3780,2990 3780,2695 3800,2675 3870,2605 4435,2605 4435,2970 4510,3045
GND on Solder Side "Component Side-No Net 1" (solid, remove dead copper, pour order 90): 3346.01,2729.9 3350.91,2725 3540,2725 3540,2520 3535,2515 3530,2510 3335,2510 3280,2510 3260,2530 3243.27,2546.73 3243.27,2730.93
GND on Solder Side "Component Side-No Net 1" (solid, remove dead copper, pour order 95): 3720,2925 3695,2900 3695,2785 3695,2710 3690,2705 3700,2695 3830,2695 3830,2748.11 3918.52,2836.63 3930,2848.11 3930,2960 3730,2960 3720,2950
SGND on Solder Side "Component Side-No Net 1" (solid, remove dead copper, pour order 55): 3275,2650 3481.24,2650 3481.24,2459.83 3472.05,2450.65 3471.4,2450 3265,2450
SGND on Solder Side "Component Side-No Net 1" (solid, remove dead copper, pour order 61): 3271.11,2633.37 3431.63,2633.37 3445,2620 3455,2610 3455,2470 3260,2470
SGND on Ground Plane (split plane): 4264.85,2873.13 4260.58,2852.63 4255.54,2832.31 4249.74,2812.2 4243.2,2792.31 4235.91,2772.68 4227.9,2753.34 4219.17,2734.31 4209.74,2715.62 4199.61,2697.3 4188.81,2679.36 4177.34,2661.85 4165.22,2644.77 4152.48,2628.17 4139.12,2612.04 4125.17,2596.43 4110.65,2581.36 4095.57,2566.83 4079.96,2552.88 4063.84,2539.52 4047.23,2526.78 4030.15,2514.66 4012.64,2503.19 3994.7,2492.39 3976.38,2482.26 3957.69,2472.83 3938.66,2464.1 3919.32,2456.09 3899.69,2448.8 3879.8,2442.26 3859.69,2436.46 3839.37,2431.42 3820.1,2427.4 3820.1,2465 3819.71,2466.95 3818.6,2468.6 3813.6,2473.6 3811.95,2474.71 3810,2475.1 3770,2475.1 3768.05,2474.71 3766.4,2473.6 3757.89,2465.1 3732.11,2465.1 3723.6,2473.6 3721.95,2474.71 3720,2475.1 3682.11,2475.1 3673.6,2483.6 3671.95,2484.71 3670,2485.1 3537.11,2485.1 3533.89,2488.31 3532.24,2489.42 3530.29,2489.81 3507.4,2489.81 3488.6,2508.6 3486.95,2509.71 3485,2510.1 3462.11,2510.1 3448.6,2523.6 3446.95,2524.71 3445,2525.1 3429.9,2525.1 3375.1,2579.9 3375.1,2580 3460,2580 3460,2670 3375.1,2670 3375.1,2684.9 3440,2684.9 3441.95,2685.29 3443.6,2686.4 3482.11,2724.9 3532.89,2724.9 3556.4,2701.4 3558.05,2700.29 3560,2699.9 3615,2699.9 3616.95,2700.29 3618.6,2701.4 3692.11,2774.9 3980,2774.9 3981.95,2775.29 3983.6,2776.4 3984.71,2778.05 3985.1,2780 3985.1,2886.43 4267.11,2886.43
GND on Ground Plane (split plane): 3349.6,3080.01 3349.99,3076.09 3351.13,3072.32 3352.99,3068.85 3355.49,3065.8 3358.53,3063.31 3362.01,3061.45 3365.78,3060.3 3369.7,3059.92 3594.92,3059.92 3594.92,2995.01 3595.3,2991.09 3596.45,2987.32 3598.31,2983.85 3600.8,2980.8 3603.85,2978.31 3607.32,2976.45 3611.09,2975.3 3615.01,2974.92 3974.9,2974.92 3974.9,2785.1 3690,2785.1 3688.05,2784.71 3686.4,2783.6 3612.89,2710.1 3562.11,2710.1 3538.6,2733.6 3536.95,2734.71 3535,2735.1 3480,2735.1 3478.05,2734.71 3476.4,2733.6 3437.89,2695.1 3370,2695.1 3368.05,2694.71 3366.4,2693.6 3365.29,2691.95 3364.9,2690 3364.9,2577.79 3365.29,2575.84 3366.4,2574.19 3424.19,2516.4 3425.84,2515.29 3427.79,2514.9 3442.89,2514.9 3456.4,2501.4 3458.05,2500.29 3460,2499.9 3482.89,2499.9 3501.69,2481.11 3503.34,2480 3505.29,2479.61 3528.18,2479.61 3531.4,2476.4 3533.05,2475.29 3535,2474.9 3667.89,2474.9 3676.4,2466.4 3678.05,2465.29 3680,2464.9 3717.89,2464.9 3726.4,2456.4 3728.05,2455.29 3730,2454.9 3760,2454.9 3761.95,2455.29 3763.6,2456.4 3772.11,2464.9 3807.89,2464.9 3809.9,2462.89 3809.9,2425.62 3798.23,2423.64 3777.48,2420.91 3756.63,2418.95 3735.73,2417.78 3714.8,2417.39 3693.86,2417.78 3672.96,2418.95 3652.12,2420.91 3631.36,2423.64 3610.72,2427.15 3590.23,2431.42 3569.91,2436.46 3549.79,2442.26 3529.9,2448.8 3510.27,2456.09 3490.93,2464.1 3471.9,2472.83 3453.21,2482.26 3434.89,2492.39 3416.96,2503.19 3399.44,2514.66 3382.37,2526.78 3365.76,2539.52 3349.64,2552.88 3334.02,2566.83 3318.95,2581.36 3304.42,2596.43 3290.47,2612.04 3277.11,2628.17 3264.37,2644.77 3252.25,2661.85 3240.79,2679.36 3229.98,2697.3 3219.85,2715.62 3210.42,2734.31 3201.69,2753.34 3193.68,2772.68 3186.4,2792.31 3182.22,2805 3300,2805 3300,2865 3166.44,2865 3164.74,2873.13 3161.23,2893.77 3158.5,2914.53 3156.55,2935.37 3155.37,2956.27 3154.98,2977.2 3155.02,2979.38 3155.08,2979.99 3155.08,3059.92 3239.84,3059.92 3243.76,3060.3 3247.53,3061.45 3251.01,3063.31 3254.05,3065.8 3256.55,3068.85 3258.41,3072.32 3259.55,3076.09 3259.94,3080.01 3259.94,3269.93 3261.26,3270.48 3267.2,3273.76 3272.73,3277.69 3277.79,3282.21 3282.31,3287.27 3286.24,3292.8 3289.52,3298.74 3292.12,3305.01 3293.66,3310.35 3349.6,3310.35
GND on Power Plane (split plane): 3619.9,2897.89 3619.9,2840 3620.29,2838.05 3621.4,2836.4 3666.4,2791.4 3668.05,2790.29 3670,2789.9 3684.9,2789.9 3684.9,2734.9 3660.39,2710.39 3550.1,2710.39 3550.1,2835.1 3549.71,2837.05 3548.6,2838.7 3540.1,2847.21 3540.1,2904.9 3612.89,2904.9
LEDO on Power Plane (split plane): 4260.58,2852.63 4255.54,2832.31 4249.74,2812.2 4243.2,2792.31 4235.91,2772.68 4227.9,2753.34 4219.17,2734.31 4209.74,2715.62 4199.61,2697.3 4188.81,2679.36 4177.34,2661.85 4165.22,2644.77 4152.48,2628.17 4139.12,2612.04 4129.8,2601.61 4117.8,2613.6 4116.14,2614.71 4114.19,2615.1 4022.11,2615.1 4015.1,2622.11 4015.1,2647.89 4022.11,2654.9 4030,2654.9 4031.95,2655.29 4033.6,2656.4 4057.11,2679.9 4105,2679.9 4106.95,2680.29 4108.6,2681.4 4168.6,2741.4 4169.71,2743.05 4170.1,2745 4170.1,2857.89 4182.11,2869.9 4264.18,2869.9
no net on Power Plane (split plane): 3503.9,2683.9 3505.55,2682.79 3507.5,2682.4 3509.45,2682.79 3511.1,2683.9 3524.32,2697.11 3545,2697.11 3546.95,2697.5 3548.6,2698.6 3549.67,2700.19 3584.9,2700.19 3584.9,2647.11 3517.89,2580.1 3427.11,2580.1 3420.1,2587.11 3420.1,2615 3430,2615 3430,2645 3395,2645 3395,2635.1 3370.1,2635.1 3370.1,2689.9 3415,2689.9 3416.95,2690.29 3418.6,2691.4 3427.11,2699.9 3485,2699.9 3486.95,2700.29 3487.28,2700.51
3V3 on Power Plane (split plane): 4274.22,2956.27 4273.05,2935.37 4271.09,2914.53 4268.36,2893.77 4266.04,2880.1 4180,2880.1 4178.05,2879.71 4176.4,2878.6 4161.4,2863.6 4160.29,2861.95 4159.9,2860 4159.9,2747.11 4102.89,2690.1 4055,2690.1 4053.05,2689.71 4051.4,2688.6 4027.89,2665.1 4020,2665.1 4018.05,2664.71 4016.4,2663.6 4006.4,2653.6 4005.29,2651.95 4004.9,2650 4004.9,2620 4005.29,2618.05 4006.4,2616.4 4016.4,2606.4 4018.05,2605.29 4020,2604.9 4112.08,2604.9 4122.9,2594.08 4110.65,2581.36 4095.57,2566.83 4079.96,2552.88 4063.84,2539.52 4047.23,2526.78 4030.15,2514.66 4012.64,2503.19 3994.7,2492.39 3976.38,2482.26 3957.69,2472.83 3938.66,2464.1 3919.32,2456.09 3899.69,2448.8 3879.8,2442.26 3859.69,2436.46 3839.37,2431.42 3818.87,2427.15 3798.23,2423.64 3777.48,2420.91 3756.63,2418.95 3735.73,2417.78 3714.8,2417.39 3693.86,2417.78 3672.96,2418.95 3652.12,2420.91 3631.36,2423.64 3610.72,2427.15 3590.23,2431.42 3569.91,2436.46 3549.79,2442.26 3529.9,2448.8 3510.27,2456.09 3490.93,2464.1 3471.9,2472.83 3453.21,2482.26 3434.89,2492.39 3416.96,2503.19 3399.44,2514.66 3390.1,2521.29 3390.1,2539.9 3540,2539.9 3541.95,2540.29 3543.6,2541.4 3622.11,2619.9 3650,2619.9 3651.95,2620.29 3653.6,2621.4 3658.6,2626.4 3659.71,2628.05 3660.1,2630 3660.1,2667.89 3667.11,2674.9 3737.89,2674.9 3746.4,2666.4 3748.05,2665.29 3750,2664.9 3770,2664.9 3771.95,2665.29 3773.6,2666.4 3783.6,2676.4 3784.71,2678.05 3785.1,2680 3785.1,2720 3784.71,2721.95 3783.6,2723.6 3770.81,2736.4 3769.16,2737.5 3767.21,2737.89 3695.1,2737.89 3695.1,2789.9 3925,2789.9 3926.95,2790.29 3928.6,2791.4 3938.6,2801.4 3939.71,2803.05 3940.1,2805 3940.1,2840 3940.1,2974.92 4274.57,2974.92
MBEN on Power Plane (split plane): 3774.9,2717.89 3774.9,2682.11 3767.89,2675.1 3752.11,2675.1 3743.6,2683.6 3741.95,2684.71 3740,2685.1 3665,2685.1 3663.05,2684.71 3661.4,2683.6 3651.4,2673.6 3650.29,2671.95 3649.9,2670 3649.9,2632.11 3647.89,2630.1 3620,2630.1 3618.05,2629.71 3616.4,2628.6 3537.89,2550.1 3387.11,2550.1 3370.1,2567.11 3370.1,2624.9 3395,2624.9 3395,2615 3409.9,2615 3409.9,2585 3410.29,2583.05 3411.4,2581.4 3421.4,2571.4 3423.05,2570.29 3425,2569.9 3520,2569.9 3521.95,2570.29 3523.6,2571.4 3593.6,2641.4 3594.71,2643.05 3595.1,2645 3595.1,2700.19 3662.5,2700.19 3664.45,2700.58 3666.1,2701.69 3692.11,2727.69 3765.1,2727.69
no net on Power Plane (split plane): 3349.6,3080.01 3349.99,3076.09 3351.13,3072.32 3352.99,3068.85 3355.49,3065.8 3358.53,3063.31 3362.01,3061.45 3365.78,3060.3 3369.7,3059.92 3594.92,3059.92 3594.92,2995.01 3595.3,2991.09 3596.45,2987.32 3598.31,2983.85 3600.8,2980.8 3603.85,2978.31 3607.32,2976.45 3611.09,2975.3 3615.01,2974.92 3929.9,2974.92 3929.9,2850.1 3672.11,2850.1 3665.1,2857.11 3665.1,2905 3664.71,2906.95 3663.6,2908.6 3618.6,2953.6 3616.95,2954.71 3615,2955.1 3522.11,2955.1 3508.6,2968.6 3506.95,2969.71 3505,2970.1 3415,2970.1 3413.05,2969.71 3411.4,2968.6 3377.89,2935.1 3365.1,2935.1 3365.1,2995 3364.71,2996.95 3363.6,2998.6 3358.6,3003.6 3356.95,3004.71 3355,3005.1 3320,3005.1 3318.05,3004.71 3316.4,3003.6 3306.4,2993.6 3305.29,2991.95 3304.9,2990 3304.9,2982.11 3252.89,2930.1 3157.04,2930.1 3156.55,2935.37 3155.37,2956.27 3154.98,2977.2 3155.02,2979.38 3155.08,2979.99 3155.08,3059.92 3239.84,3059.92 3243.76,3060.3 3247.53,3061.45 3251.01,3063.31 3254.05,3065.8 3256.55,3068.85 3258.41,3072.32 3259.55,3076.09 3259.94,3080.01 3259.94,3269.93 3261.26,3270.48 3267.2,3273.76 3272.73,3277.69 3277.79,3282.21 3282.31,3287.27 3286.24,3292.8 3289.52,3298.74 3292.12,3305.01 3293.66,3310.35 3349.6,3310.35
GND on Power Plane (split plane): 3481.4,2906.4 3494.9,2892.89 3494.9,2840 3495.29,2838.05 3496.4,2836.4 3509.9,2822.89 3509.9,2740.1 3485,2740.1 3483.05,2739.71 3481.4,2738.6 3480.29,2736.95 3479.9,2735 3479.9,2710.1 3425,2710.1 3423.05,2709.71 3421.4,2708.6 3412.89,2700.1 3357.11,2700.1 3322.21,2735 3323.6,2736.4 3324.71,2738.05 3325.1,2740 3325.1,2862.89 3357.11,2894.9 3385,2894.9 3386.95,2895.29 3388.6,2896.4 3412.11,2919.9 3467.89,2919.9
VLED on Power Plane (split plane): 3516.4,2946.4 3518.05,2945.29 3520,2944.9 3612.89,2944.9 3654.9,2902.89 3654.9,2855 3655.29,2853.05 3656.4,2851.4 3666.4,2841.4 3668.05,2840.29 3670,2839.9 3927.89,2839.9 3929.9,2837.89 3929.9,2807.11 3922.89,2800.1 3672.11,2800.1 3630.1,2842.11 3630.1,2900 3629.71,2901.95 3628.6,2903.6 3618.6,2913.6 3616.95,2914.71 3615,2915.1 3535,2915.1 3533.05,2914.71 3531.4,2913.6 3530.29,2911.95 3529.9,2910 3529.9,2845.1 3530.29,2843.15 3531.4,2841.49 3539.9,2832.99 3539.9,2707.31 3522.21,2707.31 3520.26,2706.92 3518.6,2705.81 3507.5,2694.71 3490.1,2712.11 3490.1,2729.9 3515,2729.9 3516.95,2730.29 3518.6,2731.4 3519.71,2733.05 3520.1,2735 3520.1,2825 3519.71,2826.95 3518.6,2828.6 3505.1,2842.11 3505.1,2895 3504.71,2896.95 3503.6,2898.6 3488.6,2913.6 3473.6,2928.6 3471.95,2929.71 3470,2930.1 3410,2930.1 3408.05,2929.71 3406.4,2928.6 3382.89,2905.1 3355,2905.1 3353.05,2904.71 3351.4,2903.6 3316.4,2868.6 3315.29,2866.95 3314.9,2865 3314.9,2742.11 3307.89,2735.1 3237.11,2735.1 3230.1,2742.11 3230.1,2757.69 3242.31,2769.9 3280,2769.9 3281.95,2770.29 3283.6,2771.4 3293.6,2781.4 3294.71,2783.05 3295.1,2785 3295.1,2902.89 3317.11,2924.9 3380,2924.9 3381.95,2925.29 3383.6,2926.4 3417.11,2959.9 3502.89,2959.9
IVCC on Power Plane (split plane): 3354.9,2992.89 3354.9,2935.1 3315,2935.1 3313.05,2934.71 3311.4,2933.6 3286.4,2908.6 3285.29,2906.95 3284.9,2905 3284.9,2787.11 3277.89,2780.1 3240.2,2780.1 3238.25,2779.71 3236.59,2778.6 3221.4,2763.41 3220.29,2761.75 3219.9,2759.8 3219.9,2740 3220.29,2738.05 3221.4,2736.4 3231.4,2726.4 3233.05,2725.29 3235,2724.9 3310,2724.9 3311.95,2725.29 3313.6,2726.4 3315,2727.79 3351.4,2691.4 3353.05,2690.29 3355,2689.9 3359.9,2689.9 3359.9,2630 3359.9,2565 3360.29,2563.05 3361.4,2561.4 3379.9,2542.89 3379.9,2528.67 3365.76,2539.52 3349.64,2552.88 3334.02,2566.83 3318.95,2581.36 3304.42,2596.43 3290.47,2612.04 3277.11,2628.17 3264.37,2644.77 3252.25,2661.85 3240.79,2679.36 3229.98,2697.3 3219.85,2715.62 3210.42,2734.31 3201.69,2753.34 3193.68,2772.68 3186.4,2792.31 3179.85,2812.2 3174.06,2832.31 3169.02,2852.63 3164.74,2873.13 3161.23,2893.77 3158.5,2914.53 3158,2919.9 3255,2919.9 3256.95,2920.29 3258.6,2921.4 3313.6,2976.4 3314.71,2978.05 3315.1,2980 3315.1,2987.89 3322.11,2994.9 3352.89,2994.9

## Keep-outs
Keep-Out Layer:
  lines w10: 4020,2990 3610,2990 ; 3610,2990 3610,3075 ; 3610,2990 3610,3075 ; 3610,2990 4289.6,2990 4289.6,2977.2 cw(c3714.8,2977.2) 3140,2979.99 3140,3075 3244.86,3075 3244.86,3280.65 ccw(c3235,3325) 3280.43,3325.43 3364.68,3325.43 3364.68,3075 3610,3075

## Other copper
Ground Plane (plane layer: these items are gaps in the copper):
  rectangle: 3165,2805 3300,2865
  rectangle: 3980,2886.43 4287.92,2985
  rectangle: 3880,2590 3975,2680
  rectangle: 3375,2580 3460,2670
  lines w10: 3815,2415 3815,2465 3810,2470 3770,2470 3760,2460 3730,2460 3720,2470 3680,2470 3670,2480 3620,2480 3535,2480 3530.29,2484.71 3505.29,2484.71 3485,2505 3460,2505 3445,2520 3427.79,2520 3370,2577.79 3370,2690 3440,2690 3480,2730 3535,2730 3560,2705 3615,2705 3690,2780 3980,2780 3980,2995.01
Power Plane (plane layer: these items are gaps in the copper):
  rectangle: 3910,2620 3945,2655
  rectangle: 3395,2615 3430,2645
  lines w10: 3155,2925 3255,2925 3310,2980 3310,2990 3320,3000 3355,3000 3360,2995 3360,2930 ; 3315,2735 3355,2695 3415,2695 3425,2705 3485,2705 ; 3365,2695 3365,2630 ; 3385,2502.77 3385,2545 ; 3545,2705 3545.29,2705.29 3662.5,2705.29 3690,2732.79 ; 3590,2705.29 3590,2645 3520,2575 3425,2575 3415,2585 3415,2620 3405,2630 3365,2630 ; 3690,2795 3690,2732.79 ; 3935,2990 3935,2840 ; 4140.57,2583.62 4114.19,2610 4020,2610 4010,2620 4010,2650 4020,2660 4030,2660 4055,2685 4105,2685 4165,2745 4165,2860 4180,2875 4285,2875 ; 3365,2630 3365,2565 3385,2545 ; 3385,2545 3540,2545 3620,2625 3650,2625 3655,2630 3655,2670 3665,2680 3710,2680 3740,2680 3750,2670 3770,2670 3780,2680 3780,2720 3767.21,2732.79 3690,2732.79 ; 3935,2840 3930,2845 3825,2845 3670,2845 3660,2855 3660,2905 3615,2950 3520,2950 3505,2965 3415,2965 3380,2930 3315,2930 3290,2905 3290,2785 3280,2775 3240.2,2775 3225,2759.8 3225,2740 3235,2730 3310,2730 3320,2740 3320,2865 3355,2900 3385,2900 3410,2925 3470,2925 3485,2910 3500,2895 3500,2840 3515,2825 3515,2735 3485,2735 3485,2710 3507.5,2687.5 3522.21,2702.21 3545,2702.21 3545,2835.1 3535,2845.1 3535,2910 3615,2910 3625,2900 3625,2840 3670,2795 3925,2795 3935,2805 3935,2840

## Silkscreen, mask and mechanical layers (free items; w line width, h text height)
Top Overlay:
  rectangle: 3756.69,2663.19 3780,2686.81
  rectangle: 3756.69,2528.19 3780,2551.81
  rectangle: 3653.19,2425.94 3676.81,2455
  rectangle: 3340,2960 3365,2985
  rectangle: 3650,2730 3665,2745
  rectangle: 4010,2635 4030,2655
  text "DiffTorch" at 3300,3240 h62.99 r270
  text "Extreme" at 3265,3225 h68.9 r270
  text "MoonDLC" at 3165,3005 h78.74
  text "+" at 3290,2860 h60 r90
  text "NTC" at 3350,2790 h68.9 r90
  text "Key" at 4180,2780 h78.74 r270
  text "V+" at 4105,2560 h57.09 r90
  text "JA" at 3540,2555 h80 r90
  text "V1.1" at 3405,2520 h62.99
  text "Red35" at 3845,2475 h78.74
Bottom Overlay:
  text "JLCJLCJLCJLC" at 3590,2990 h68.9
  text "Super-MoonLight" at 3895,2900 h78.74
  text "DLC Board V1.1" at 3870,2830 h78.74
  text "By:" at 3920,2755 h78.74
  text "Redstoner_35" at 3810,2750 h98.43
  text "Project:" at 3770,2645 h65
  text "DiffTorch" at 3815,2570 h90
  text "Extreme" at 3780,2515 h85
Top Solder:
  rectangle: 3290,3249.78 3355,3330
Bottom Solder:
  rectangle: 3290,3249.78 3355,3330.66